# Altium PCB T6_1.PcbDoc
Units mm, origin at the board's own origin, x right, y up, seen from the top; angles counter-clockwise.
Board outline 152.4 x 101.6 mm, 2 copper layers (Top Layer, Bottom Layer); 100 components, 21 nets, 243 pads, 24 vias.
Unrouted connection lines stored in the file: 15.
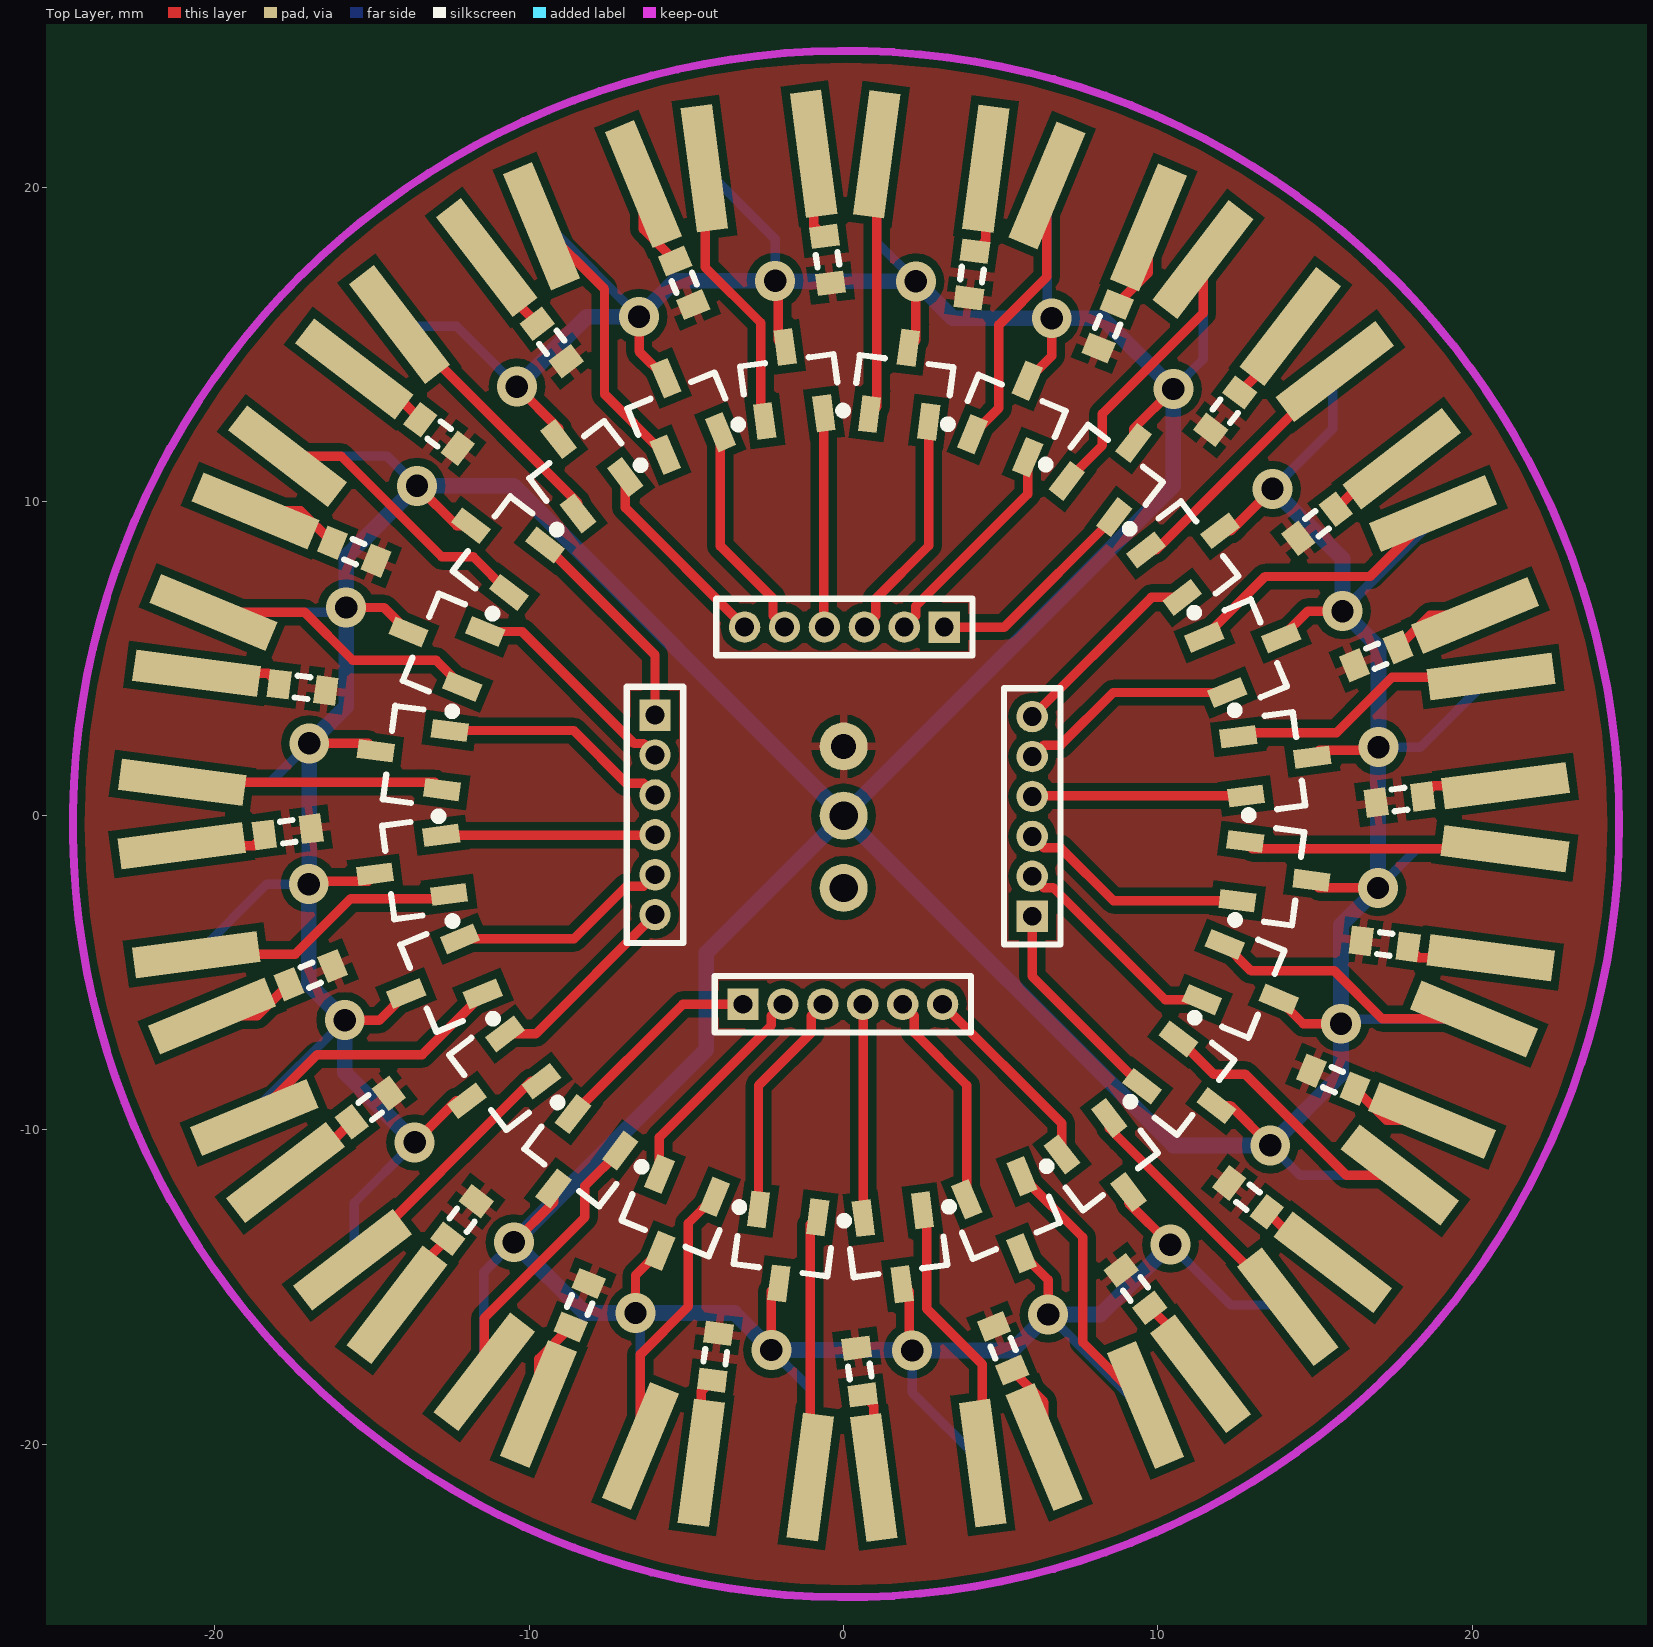
[diagram p0: Top Layer view]
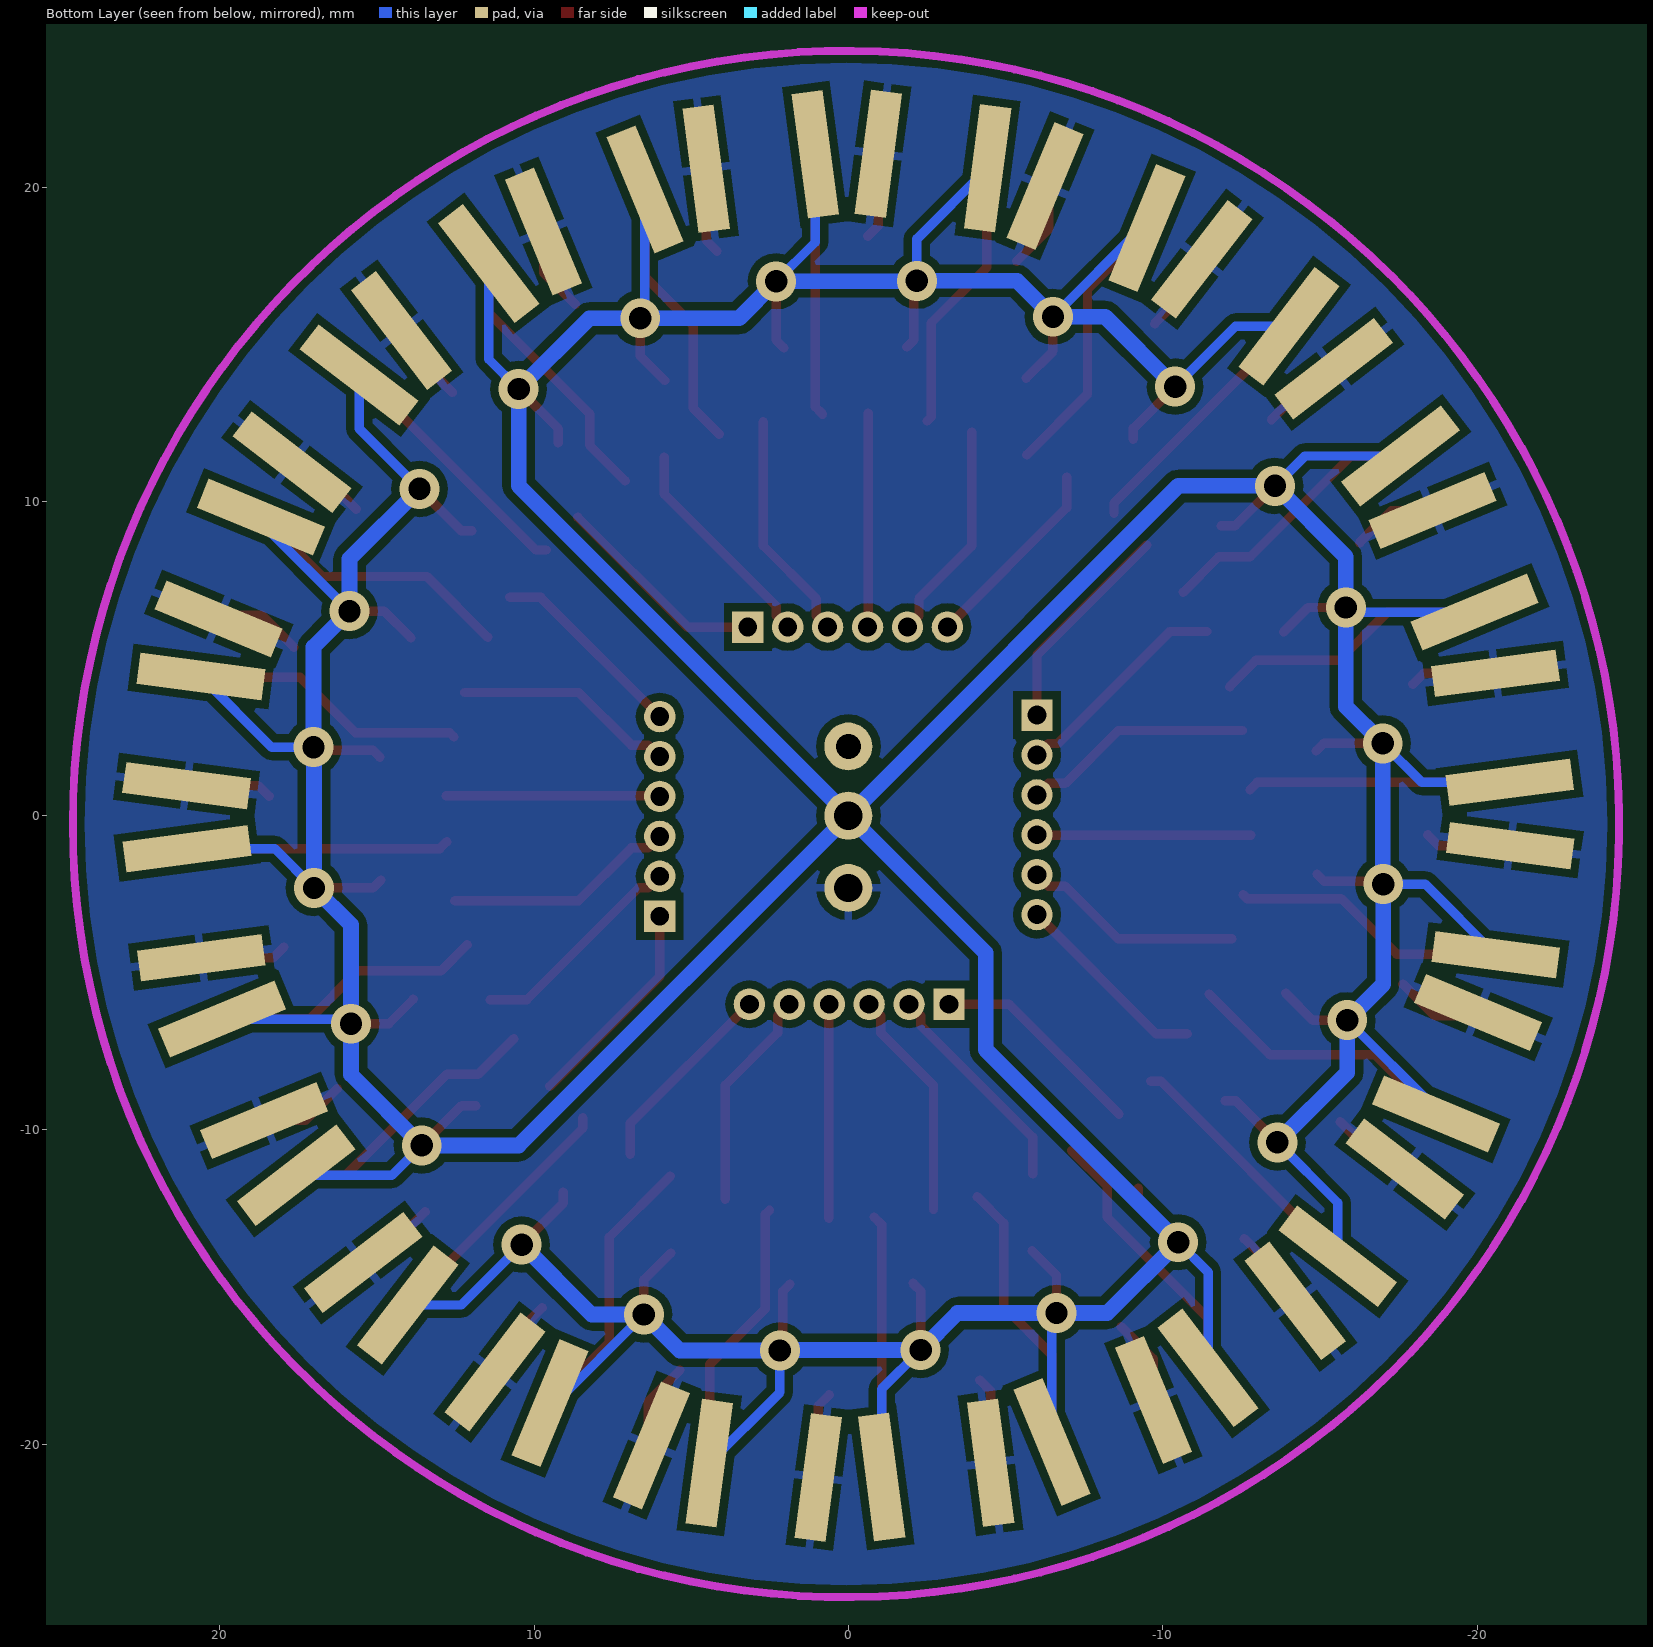
[diagram p1: Bottom Layer view, seen from below]

## Layer stack, top to bottom
Top Solder: solder mask 0.0102, Solder Resist, Dk 3.5
Top Layer: signal copper 0.0356
Dielectric 1: dielectric 0.32, FR-4, Dk 4.8
Bottom Layer: signal copper 0.0356
Bottom Solder: solder mask 0.0102, Solder Resist, Dk 3.5

## Board outline
-74.6,-56.4 77.8,-56.4 77.8,45.2 -74.6,45.2

## Design rules (kind name [scope] priority, off if disabled: settings)
Clearance [All] p1: gap=0.254
PolygonConnect [All] p1: connectstyle=Relief reliefconductorwidth=0.254 reliefentries=4 polygonreliefangle="90 Angle" airgapwidth=0.254
RoomDefinition SheetT6 [InComponentClass('SheetT6')] p1: confinementstyle=ConfineOut formatcopy=TRUE lockcomponents=FALSE outline 70.434,-54.495 166.446,-54.495 166.446,-36.207 70.434,-36.207
RoutingVias [All] p1: holewidth=0.711 width=1.27 viastyle="Through Hole" minholewidth=0.711 minwidth=1.27 maxholewidth=0.711 maxwidth=1.27
SolderMaskExpansion [All] p1: expansion=0.102
Width [All] p1: maxlimit=0.5 minlimit=0.3 preferedwidth=0.5
30 further rules are at their usual default settings.

## Classes and differential pairs
component class SheetT6: D1 D2 D3 D4 D5 D6 D? P1 P? Q1 Q2 Q3 Q4 Q5 Q6 R1 R2 R3 R4 R5 R6

## Components (designator, comment, footprint, x,y, rotation, side; value= is the part's Value field where it differs from the comment)
D1 "IR57-21C" SFH325 11.356,-17.756 r37.5 top
D1 "IR57-21C" SFH325 -17.756,-11.356 r307.5 top
D1 "IR57-21C" SFH325 17.756,11.356 r127.5 top
D1 "IR57-21C" SFH325 -11.356,17.756 r217.5 top
D2 "IR57-21C" SFH325 6.373,-20.09 r22.5 top
D2 "IR57-21C" SFH325 -20.09,-6.373 r292.5 top
D2 "IR57-21C" SFH325 20.09,6.373 r112.5 top
D2 "IR57-21C" SFH325 -6.373,20.09 r202.5 top
D3 "IR57-21C" SFH325 0.956,-21.055 r7.5 top
D3 "IR57-21C" SFH325 -21.055,-0.956 r277.5 top
D3 "IR57-21C" SFH325 21.055,0.956 r97.5 top
D3 "IR57-21C" SFH325 -0.956,21.055 r187.5 top
D4 "IR57-21C" SFH325 -4.526,-20.585 r352.5 top
D4 "IR57-21C" SFH325 -20.585,4.526 r262.5 top
D4 "IR57-21C" SFH325 20.585,-4.526 r82.5 top
D4 "IR57-21C" SFH325 4.526,20.585 r172.5 top
D5 "IR57-21C" SFH325 -9.699,-18.713 r337.5 top
D5 "IR57-21C" SFH325 -18.713,9.699 r247.5 top
D5 "IR57-21C" SFH325 18.713,-9.699 r67.5 top
D5 "IR57-21C" SFH325 9.699,18.713 r157.5 top
D6 "IR57-21C" SFH325 -14.212,-15.565 r322.5 top
D6 "IR57-21C" SFH325 -15.565,14.212 r232.5 top
D6 "IR57-21C" SFH325 15.565,-14.212 r52.5 top
D6 "IR57-21C" SFH325 14.212,15.565 r142.5 top
D? "PT57-21B" SFH325 -9.706,-18.585 r337.5 bottom
D? "PT57-21B" SFH325 -14.219,-15.437 r322.5 bottom
D? "PT57-21B" SFH325 -4.526,-20.585 r352.5 bottom
D? "PT57-21B" SFH325 0.956,-21.055 r7.5 bottom
D? "PT57-21B" SFH325 6.26,-20.033 r22.5 bottom
D? "PT57-21B" SFH325 11.242,-17.699 r37.5 bottom
D? "PT57-21B" SFH325 -17.699,-11.242 r307.5 bottom
D? "PT57-21B" SFH325 -20.033,-6.26 r292.5 bottom
D? "PT57-21B" SFH325 -21.055,-0.956 r277.5 bottom
D? "PT57-21B" SFH325 -20.585,4.526 r262.5 bottom
D? "PT57-21B" SFH325 -15.437,14.219 r232.5 bottom
D? "PT57-21B" SFH325 -18.585,9.706 r247.5 bottom
D? "PT57-21B" SFH325 18.585,-9.706 r67.5 bottom
D? "PT57-21B" SFH325 15.437,-14.219 r52.5 bottom
D? "PT57-21B" SFH325 20.585,-4.526 r82.5 bottom
D? "PT57-21B" SFH325 21.055,0.956 r97.5 bottom
D? "PT57-21B" SFH325 20.033,6.26 r112.5 bottom
D? "PT57-21B" SFH325 17.699,11.242 r127.5 bottom
D? "PT57-21B" SFH325 -11.242,17.699 r217.5 bottom
D? "PT57-21B" SFH325 -6.26,20.033 r202.5 bottom
D? "PT57-21B" SFH325 -0.956,21.055 r187.5 bottom
D? "PT57-21B" SFH325 4.526,20.585 r172.5 bottom
D? "PT57-21B" SFH325 14.219,15.437 r142.5 bottom
D? "PT57-21B" SFH325 9.706,18.585 r157.5 bottom
P? "MHDR1X6" MHDR1X6 -3.2,-6 r0 top
P? "MHDR1X6" MHDR1X6 -6,3.2 r270 top
P? "MHDR1X6" MHDR1X6 6,-3.2 r90 top
P? "MHDR1X6" MHDR1X6 3.2,6 r180 top
Q1 "AO3400" SOT-23B_N 8.382,-11.088 r307.5 top
Q1 "AO3400" SOT-23B_N -11.088,-8.382 r217.5 top
Q1 "AO3400" SOT-23B_N 11.088,8.382 r37.5 top
Q1 "AO3400" SOT-23B_N -8.382,11.088 r127.5 top
Q2 "AO3400" SOT-23B_N 5.227,-12.88 r292.5 top
Q2 "AO3400" SOT-23B_N -12.88,-5.227 r202.5 top
Q2 "AO3400" SOT-23B_N 12.88,5.227 r22.5 top
Q2 "AO3400" SOT-23B_N -5.227,12.88 r112.5 top
Q3 "AO3400" SOT-23B_N 1.715,-13.794 r277.5 top
Q3 "AO3400" SOT-23B_N -13.794,-1.715 r187.5 top
Q3 "AO3400" SOT-23B_N 13.794,1.715 r7.5 top
Q3 "AO3400" SOT-23B_N -1.715,13.794 r97.5 top
Q4 "AO3400" SOT-23B_N -1.913,-13.768 r262.5 top
Q4 "AO3400" SOT-23B_N -13.768,1.913 r172.5 top
Q4 "AO3400" SOT-23B_N 13.768,-1.913 r352.5 top
Q4 "AO3400" SOT-23B_N 1.913,13.768 r82.5 top
Q5 "AO3400" SOT-23B_N -5.412,-12.804 r247.5 top
Q5 "AO3400" SOT-23B_N -12.804,5.412 r157.5 top
Q5 "AO3400" SOT-23B_N 12.804,-5.412 r337.5 top
Q5 "AO3400" SOT-23B_N 5.412,12.804 r67.5 top
Q6 "AO3400" SOT-23B_N -8.541,-10.967 r232.5 top
Q6 "AO3400" SOT-23B_N -10.967,8.541 r142.5 top
Q6 "AO3400" SOT-23B_N 10.967,-8.541 r322.5 top
Q6 "AO3400" SOT-23B_N 8.541,10.967 r52.5 top
R1 "51R" J1-0603 9.286,-15.059 r127.5 top
R1 "51R" J1-0603 -15.059,-9.286 r37.5 top
R1 "51R" J1-0603 15.059,9.286 r217.5 top
R1 "51R" J1-0603 -9.286,15.059 r307.5 top
R2 "51R" J1-0603 5.072,-16.949 r112.5 top
R2 "51R" J1-0603 -16.949,-5.072 r22.5 top
R2 "51R" J1-0603 16.949,5.072 r202.5 top
R2 "51R" J1-0603 -5.072,16.949 r292.5 top
R3 "51R" J1-0603 0.513,-17.684 r97.5 top
R3 "51R" J1-0603 -17.684,-0.513 r7.5 top
R3 "51R" J1-0603 17.684,0.513 r187.5 top
R3 "51R" J1-0603 -0.513,17.684 r277.5 top
R4 "51R" J1-0603 -4.082,-17.214 r82.5 top
R4 "51R" J1-0603 -17.214,4.082 r352.5 top
R4 "51R" J1-0603 17.214,-4.082 r172.5 top
R4 "51R" J1-0603 4.082,17.214 r262.5 top
R5 "51R" J1-0603 -8.398,-15.571 r67.5 top
R5 "51R" J1-0603 -15.571,8.398 r337.5 top
R5 "51R" J1-0603 15.571,-8.398 r157.5 top
R5 "51R" J1-0603 8.398,15.571 r247.5 top
R6 "51R" J1-0603 -12.142,-12.867 r52.5 top
R6 "51R" J1-0603 -12.867,12.142 r322.5 top
R6 "51R" J1-0603 12.867,-12.142 r142.5 top
R6 "51R" J1-0603 12.142,12.867 r232.5 top

## Footprints (in the part's own frame and the unit in brackets; to place one, negate y for a bottom-side part, rotate by r counter-clockwise, add the part's x,y. Pads: shape width x height; smd on the part's side, far side on the other; paste and mask are expansions set on the pad)
J1-0603 [mm] "Chip Resistor, Body 1.6x0.8mm, IPC High Density"
  rect 0.7x0.9 smd: 1(-0.75,0) 2(0.75,0)
  silkscreen extent -0.2,-0.35 0.2,0.35, body extent -0.85,-0.48 0.85,0.48, height 0.9
MHDR1X6 [mm] "Connector; Header; 6 Position"
  rect 1x1 hole 0.6: 1(0,0)
  round 1 hole 0.6: 2(1.27,0) 3(2.54,0) 4(3.81,0) 5(5.08,0) 6(6.35,0)
  silkscreen extent -0.9,-0.9 7.25,0.9
SFH325 [mm]
  rect 1x4 smd: 1(0,0) 2(3.5,0)
SOT-23B_N [mm] "SOT23, 3-Leads, Body 2.9x1.3mm, Pitch 0.95mm, Lead Span 2.4mm, IPC Medium Density"
  rect 1.15x0.6 smd: 1(-1.125,0.95) 2(-1.125,-0.95) 3(1.125,0)
  silkscreen extent -1.25,-1.5 0.7,1.92, body extent -0.7,-1.5 0.7,1.5, height 1.14

## Part data
D1 D1 D1 D1 D2 D2 D2 D2 D3 D3 D3 D3 D4 D4 D4 D4 D5 D5 D5 D5 D6 D6 D6 D6 D? D? D? D? D? D? D? D? D? D? D? D? D? D? D? D? D? D? D? D? D? D? D? D?: library part Diode, "Default Diode"
P? P? P? P?: "Header, 6-Pin"
Q1 Q1 Q1 Q1 Q2 Q2 Q2 Q2 Q3 Q3 Q3 Q3 Q4 Q4 Q4 Q4 Q5 Q5 Q5 Q5 Q6 Q6 Q6 Q6: library part MOSFET-N, "N-Channel MOSFET"
R1 R1 R1 R1 R2 R2 R2 R2 R3 R3 R3 R3 R4 R4 R4 R4 R5 R5 R5 R5 R6 R6 R6 R6: library part Res3, "Resistor"

## Free pads (board coordinates)
  round 1.524 hole 0.9: 5(0,0) 6(0,-2.3)
  round 1.524 hole 0.8: 7(0,2.2)

## Via types
v1: diameter 1.27, hole 0.711, Top Layer to Bottom Layer, 24 vias

## Nets (pads, with @x,y where several pads share a name; then routed paths per layer and width w, separated by ;. In a path a pad name is that pad's centre, name@x,y a point inside that pad or via, vN(x,y) a via of type N, cw(c..) or ccw(c..) an arc to the next point about the centre after c; other vN are vias at no path point)
GND: D?.2@4.427,-20.598 D?.2@9.493,-18.693 D?.2@14.019,-15.568 D?.2@-1.056,-21.042 D?.2@-6.473,-19.925 D?.2@-11.442,-17.568 pad.5 Q1.3@9.067,-11.981 Q2.3@5.657,-13.92 Q3.3@1.862,-14.91 Q4.3@-2.06,-14.883 Q5.3@-5.842,-13.843 Q6.3@-9.226,-11.859 | length 135.1
  Top Layer w0.3: v1(-10.492,-13.572) -9.226,-12.307 Q6.3@-9.226,-11.859 ; v1(-6.622,-15.825) -6.622,-14.622 Q5.3@-5.842,-13.843 ; v1(-2.3,-17) -2.3,-15.123 Q4.3@-2.06,-14.883 ; Q3.3@1.862,-14.91 2.084,-15.132 2.084,-16.922 v1(2.178,-17.016) ; Q2.3@5.657,-13.92 6.508,-14.77 v1(6.508,-15.872) ; Q1.3@9.067,-11.981 9.067,-12.32 v1(10.394,-13.647)
  Bottom Layer w0.3: D?.2@-11.442,-17.568 -11.442,-14.523 v1(-10.492,-13.572) ; v1(-6.622,-15.825) -6.473,-15.974 D?.2@-6.473,-19.925 ; v1(-2.3,-17) -1.056,-18.244 D?.2@-1.056,-21.042 ; v1(2.178,-17.016) 2.178,-18.35 D?.2@4.427,-20.598 ; v1(6.508,-15.872) 9.329,-18.693 D?.2@9.493,-18.693 ; v1(10.394,-13.647) 12.315,-15.568 D?.2@14.019,-15.568
  Bottom Layer w0.5: v1(-13.572,10.492) -10.492,10.492 pad.5 ; v1(10.394,-13.647) 8.169,-15.872 v1(6.508,-15.872) 5.365,-17.016 v1(2.178,-17.016) 2.162,-17 v1(-2.3,-17) -3.475,-15.825 v1(-6.622,-15.825) -8.239,-15.825 v1(-10.492,-13.572) -4.369,-7.45 -4.369,-4.369 pad.5 ; v1(10.492,13.572) 10.492,10.492 pad.5 ; v1(13.572,-10.492) 10.492,-10.492 pad.5
  other v1: -13.647,-10.394 15.825,-6.622 -15.872,-6.508 17,-2.3 -17.016,-2.178 17.016,2.178 -17,2.3 15.872,6.508 -15.825,6.622 13.647,10.394 -10.394,13.647 6.622,15.825 -6.508,15.872 -2.178,17.016 2.3,17
NetD1_1: D1.1@11.356,-17.756 R1.1@9.743,-15.654 | length 2.8
  Top Layer w0.3: R1.1@9.743,-15.654 11.356,-17.267 D1.1@11.356,-17.756
NetD1_2: D1.2@14.133,-15.626 Q1.1@8.451,-9.618 | length 8.4
  Top Layer w0.3: Q1.1@8.451,-9.618 8.451,-9.944 D1.2@14.133,-15.626
NetD2_1: D2.1@6.373,-20.09 R2.1@5.359,-17.642 | length 2.9
  Top Layer w0.3: R2.1@5.359,-17.642 6.373,-18.656 D2.1@6.373,-20.09
NetD2_2: D2.2@9.607,-18.751 Q2.1@5.674,-11.477 | length 8.9
  Top Layer w0.3: Q2.1@5.674,-11.477 7.608,-13.411 7.608,-16.752 D2.2@9.607,-18.751
NetD3_1: D3.1@0.956,-21.055 R3.1@0.611,-18.428 | length 2.8
  Top Layer w0.3: R3.1@0.611,-18.428 0.956,-18.774 D3.1@0.956,-21.055
NetD3_2: D3.2@4.427,-20.598 Q3.1@2.51,-12.555 | length 8.8
  Top Layer w0.3: Q3.1@2.51,-12.555 2.638,-12.683 2.638,-15.68 4.406,-17.448 4.406,-20.598 D3.2@4.427,-20.598
NetD4_1: D4.1@-4.526,-20.585 R4.1@-4.18,-17.958 | length 2.8
  Top Layer w0.3: D4.1@-4.526,-20.585 -4.526,-18.304 R4.1@-4.18,-17.958
NetD4_2: D4.2@-1.056,-21.042 Q4.1@-0.825,-12.777 | length 8.4
  Top Layer w0.3: D4.2@-1.056,-21.042 -1.056,-13.008 Q4.1@-0.825,-12.777
NetD5_1: D5.1@-9.699,-18.713 R5.1@-8.685,-16.264 | length 2.9
  Top Layer w0.3: D5.1@-9.699,-18.713 -9.699,-17.278 R5.1@-8.685,-16.264
NetD5_2: D5.2@-6.466,-20.052 Q5.1@-4.103,-12.128 | length 8.9
  Top Layer w0.3: D5.2@-6.466,-20.052 -6.466,-17.139 -4.941,-15.614 -4.941,-12.965 Q5.1@-4.103,-12.128
NetD6_1: D6.1@-14.212,-15.565 R6.1@-12.599,-13.462 | length 2.8
  Top Layer w0.3: D6.1@-14.212,-15.565 -14.212,-15.075 R6.1@-12.599,-13.462
NetD6_2: D6.2@-11.435,-17.695 Q6.1@-7.103,-10.653 | length 8.8
  Top Layer w0.3: D6.2@-11.435,-17.695 -11.435,-15.985 -8.234,-12.784 -8.234,-11.784 Q6.1@-7.103,-10.653
NetP?_1: P?.1@-3.2,-6 Q6.2@-8.61,-9.496 | length 6.9
  Top Layer w0.3: Q6.2@-8.61,-9.496 -5.114,-6 P?.1@-3.2,-6
NetP?_2: P?.2@-1.93,-6 Q5.2@-5.859,-11.401 | length 7
  Top Layer w0.3: Q5.2@-5.859,-11.401 -5.859,-10.23 -2.296,-6.667 -2.296,-6.366 P?.2@-1.93,-6
NetP?_3: P?.3@-0.66,-6 Q4.2@-2.708,-12.529 | length 7.4
  Top Layer w0.3: Q4.2@-2.708,-12.529 -2.708,-8.586 -1.026,-6.904 -1.026,-6.366 P?.3@-0.66,-6
NetP?_4: P?.4@0.61,-6 Q3.2@0.626,-12.803 | length 6.8
  Top Layer w0.3: P?.4@0.61,-6 0.626,-6.016 Q3.2@0.626,-12.803
NetP?_5: P?.5@1.88,-6 Q2.2@3.919,-12.204 | length 7
  Top Layer w0.3: P?.5@1.88,-6 2.246,-6.366 2.246,-6.904 3.919,-8.577 Q2.2@3.919,-12.204
NetP?_6: P?.6@3.15,-6 Q1.2@6.944,-10.774 | length 6.3
  Top Layer w0.3: P?.6@3.15,-6 6.944,-9.794 Q1.2@6.944,-10.774
VCC: pad.7 R1.2 R2.2 R3.2 R4.2 R5.2 R6.2
VCC2: D?.1 pad.6
pads on no net: D1.1@17.756,11.356 D1.1@-11.356,17.756 D1.1@-17.756,-11.356 D1.2@15.626,14.133 D1.2@-14.133,15.626 D1.2@-15.626,-14.133 D2.1@20.09,6.373 D2.1@-6.373,20.09 D2.1@-20.09,-6.373 D2.2@18.751,9.607 D2.2@-9.607,18.751 D2.2@-18.751,-9.607 D3.1@21.055,0.956 D3.1@-0.956,21.055 D3.1@-21.055,-0.956 D3.2@20.598,4.427 D3.2@-4.427,20.598 D3.2@-20.598,-4.427 D4.1@4.526,20.585 D4.1@20.585,-4.526 D4.1@-20.585,4.526 D4.2@1.056,21.042 D4.2@21.042,-1.056 D4.2@-21.042,1.056 D5.1@9.699,18.713 D5.1@18.713,-9.699 D5.1@-18.713,9.699 D5.2@6.466,20.052 D5.2@20.052,-6.466 D5.2@-20.052,6.466 D6.1@14.212,15.565 D6.1@15.565,-14.212 D6.1@-15.565,14.212 D6.2@11.435,17.695 D6.2@17.695,-11.435 D6.2@-17.695,11.435 D?.2@1.056,21.042 D?.2@6.473,19.925 D?.2@11.442,17.568 D?.2@15.568,14.019 D?.2@17.568,-11.442 D?.2@18.693,9.493 D?.2@19.925,-6.473 D?.2@20.598,4.427 D?.2@21.042,-1.056 D?.2@-4.427,20.598 D?.2@-9.493,18.693 D?.2@-14.019,15.568 D?.2@-15.568,-14.019 D?.2@-17.568,11.442 D?.2@-18.693,-9.493 D?.2@-19.925,6.473 D?.2@-20.598,-4.427 D?.2@-21.042,1.056 P?.1@3.2,6 P?.1@6,-3.2 P?.1@-6,3.2 P?.2@1.93,6 P?.2@6,-1.93 P?.2@-6,1.93 P?.3@0.66,6 P?.3@6,-0.66 P?.3@-6,0.66 P?.4@6,0.61 P?.4@-0.61,6 P?.4@-6,-0.61 P?.5@6,1.88 P?.5@-1.88,6 P?.5@-6,-1.88 P?.6@6,3.15 P?.6@-3.15,6 P?.6@-6,-3.15 Q1.1@9.618,8.451 Q1.1@-8.451,9.618 Q1.1@-9.618,-8.451 Q1.2@10.774,6.944 Q1.2@-6.944,10.774 Q1.2@-10.774,-6.944 Q1.3@11.981,9.067 Q1.3@-9.067,11.981 Q1.3@-11.981,-9.067 Q2.1@11.477,5.674 Q2.1@-5.674,11.477 Q2.1@-11.477,-5.674 Q2.2@12.204,3.919 Q2.2@-3.919,12.204 Q2.2@-12.204,-3.919 Q2.3@13.92,5.657 Q2.3@-5.657,13.92 Q2.3@-13.92,-5.657 Q3.1@12.555,2.51 Q3.1@-2.51,12.555 Q3.1@-12.555,-2.51 Q3.2@12.803,0.626 Q3.2@-0.626,12.803 Q3.2@-12.803,-0.626 Q3.3@14.91,1.862 Q3.3@-1.862,14.91 Q3.3@-14.91,-1.862 Q4.1@0.825,12.777 Q4.1@12.777,-0.825 Q4.1@-12.777,0.825 Q4.2@2.708,12.529 Q4.2@12.529,-2.708 Q4.2@-12.529,2.708 Q4.3@2.06,14.883 Q4.3@14.883,-2.06 Q4.3@-14.883,2.06 Q5.1@4.103,12.128 Q5.1@12.128,-4.103 Q5.1@-12.128,4.103 Q5.2@5.859,11.401 Q5.2@11.401,-5.859 Q5.2@-11.401,5.859 Q5.3@5.842,13.843 Q5.3@13.843,-5.842 Q5.3@-13.843,5.842 Q6.1@7.103,10.653 Q6.1@10.653,-7.103 Q6.1@-10.653,7.103 Q6.2@8.61,9.496 Q6.2@9.496,-8.61 Q6.2@-9.496,8.61 Q6.3@9.226,11.859 Q6.3@11.859,-9.226 Q6.3@-11.859,9.226 R1.1@15.654,9.743 R1.1@-9.743,15.654 R1.1@-15.654,-9.743 R2.1@17.642,5.359 R2.1@-5.359,17.642 R2.1@-17.642,-5.359 R3.1@18.428,0.611 R3.1@-0.611,18.428 R3.1@-18.428,-0.611 R4.1@4.18,17.958 R4.1@17.958,-4.18 R4.1@-17.958,4.18 R5.1@8.685,16.264 R5.1@16.264,-8.685 R5.1@-16.264,8.685 R6.1@12.599,13.462 R6.1@13.462,-12.599 R6.1@-13.462,12.599
copper on no net: | length 521.8
  Top Layer w0.3: -21.055,-0.956 -18.774,-0.956 -18.428,-0.611 ; -21.042,1.056 -13.008,1.056 -12.777,0.825 ; -20.598,-4.427 -20.598,-4.406 -17.448,-4.406 -15.68,-2.638 -12.683,-2.638 -12.555,-2.51 ; -20.585,4.526 -18.304,4.526 -17.958,4.18 ; -20.09,-6.373 -18.656,-6.373 -17.642,-5.359 ; -20.052,6.466 -17.139,6.466 -15.614,4.941 -12.965,4.941 -12.128,4.103 ; -18.751,-9.607 -16.752,-7.608 -13.411,-7.608 -11.477,-5.674 ; -18.713,9.699 -17.278,9.699 -16.264,8.685 ; -17.756,-11.356 -17.267,-11.356 -15.654,-9.743 ; -17.695,11.435 -15.985,11.435 -12.784,8.234 -11.784,8.234 -10.653,7.103 ; -17.016,-2.178 -16.922,-2.084 -15.132,-2.084 -14.91,-1.862 ; -17,2.3 -15.123,2.3 -14.883,2.06 ; -15.872,-6.508 -14.77,-6.508 -13.92,-5.657 ; -15.825,6.622 -14.622,6.622 -13.843,5.842 ; -15.626,-14.133 -9.944,-8.451 -9.618,-8.451 ; -15.565,14.212 -15.075,14.212 -13.462,12.599 ; -14.133,15.626 -8.451,9.944 -8.451,9.618 ; -13.647,-10.394 -12.32,-9.067 -11.981,-9.067 ; -13.572,10.492 -12.307,9.226 -11.859,9.226 ; -12.803,-0.626 -6.016,-0.626 -6,-0.61 ; -12.529,2.708 -8.586,2.708 -6.904,1.026 -6.366,1.026 -6,0.66 ; -12.204,-3.919 -8.577,-3.919 -6.904,-2.246 -6.366,-2.246 -6,-1.88 ; -11.401,5.859 -10.23,5.859 -6.667,2.296 -6.366,2.296 -6,1.93 ; -11.356,17.756 -11.356,17.267 -9.743,15.654 ; -10.774,-6.944 -9.794,-6.944 -6,-3.15 ; -10.394,13.647 -9.067,12.32 -9.067,11.981 ; -9.607,18.751 -7.608,16.752 -7.608,13.411 -5.674,11.477 ; -9.496,8.61 -6,5.114 -6,3.2 ; -6.944,10.774 -6.944,9.794 -3.15,6 ; -6.508,15.872 -6.508,14.77 -5.657,13.92 ; -6.373,20.09 -6.373,18.656 -5.359,17.642 ; -4.427,20.598 -4.406,20.598 -4.406,17.448 -2.638,15.68 -2.638,12.683 -2.51,12.555 ; -3.919,12.204 -3.919,8.577 -2.246,6.904 -2.246,6.366 -1.88,6 ; -2.178,17.016 -2.084,16.922 -2.084,15.132 -1.862,14.91 ; -0.956,21.055 -0.956,18.774 -0.611,18.428 ; -0.626,12.803 -0.626,6.016 -0.61,6 ; 0.66,6 1.026,6.366 1.026,6.904 2.708,8.586 2.708,12.529 ; 0.825,12.777 1.056,13.008 1.056,21.042 ; 1.93,6 2.296,6.366 2.296,6.667 5.859,10.23 5.859,11.401 ; 2.06,14.883 2.3,15.123 2.3,17 ; 3.2,6 5.114,6 8.61,9.496 ; 4.103,12.128 4.941,12.965 4.941,15.614 6.466,17.139 6.466,20.052 ; 4.18,17.958 4.526,18.304 4.526,20.585 ; 5.842,13.843 6.622,14.622 6.622,15.825 ; 6,-3.2 6,-5.114 9.496,-8.61 ; 6,-1.93 6.366,-2.296 6.667,-2.296 10.23,-5.859 11.401,-5.859 ; 6,-0.66 6.366,-1.026 6.904,-1.026 8.586,-2.708 12.529,-2.708 ; 6,0.61 6.016,0.626 12.803,0.626 ; 6,1.88 6.366,2.246 6.904,2.246 8.577,3.919 12.204,3.919 ; 6,3.15 9.794,6.944 10.774,6.944 ; 7.103,10.653 8.234,11.784 8.234,12.784 11.435,15.985 11.435,17.695 ; 8.685,16.264 9.699,17.278 9.699,18.713 ; 9.226,11.859 9.226,12.307 10.492,13.572 ; 9.618,8.451 9.944,8.451 15.626,14.133 ; 10.653,-7.103 11.784,-8.234 12.784,-8.234 15.985,-11.435 17.695,-11.435 ; 11.477,5.674 13.411,7.608 16.752,7.608 18.751,9.607 ; 11.859,-9.226 12.307,-9.226 13.572,-10.492 ; 11.981,9.067 12.32,9.067 13.647,10.394 ; 12.128,-4.103 12.965,-4.941 15.614,-4.941 17.139,-6.466 20.052,-6.466 ; 12.555,2.51 12.683,2.638 15.68,2.638 17.448,4.406 20.598,4.406 20.598,4.427 ; 12.599,13.462 14.212,15.075 14.212,15.565 ; 12.777,-0.825 13.008,-1.056 21.042,-1.056 ; 13.462,-12.599 15.075,-14.212 15.565,-14.212 ; 13.843,-5.842 14.622,-6.622 15.825,-6.622 ; 13.92,5.657 14.77,6.508 15.872,6.508 ; 14.883,-2.06 15.123,-2.3 17,-2.3 ; 14.91,1.862 15.132,2.084 16.922,2.084 17.016,2.178 ; 15.654,9.743 17.267,11.356 17.756,11.356 ; 16.264,-8.685 17.278,-9.699 18.713,-9.699 ; 17.642,5.359 18.656,6.373 20.09,6.373 ; 17.958,-4.18 18.304,-4.526 20.585,-4.526 ; 18.428,0.611 18.774,0.956 21.055,0.956
  Bottom Layer w0.3: -21.042,1.056 -18.244,1.056 -17,2.3 ; -20.598,-4.427 -18.35,-2.178 -17.016,-2.178 ; -19.925,6.473 -15.974,6.473 -15.825,6.622 ; -18.693,-9.493 -18.693,-9.329 -15.872,-6.508 ; -17.568,11.442 -14.523,11.442 -13.572,10.492 ; -15.568,-14.019 -15.568,-12.315 -13.647,-10.394 ; -14.019,15.568 -12.315,15.568 -10.394,13.647 ; -9.493,18.693 -9.329,18.693 -6.508,15.872 ; -4.427,20.598 -2.178,18.35 -2.178,17.016 ; 1.056,21.042 1.056,18.244 2.3,17 ; 6.473,19.925 6.473,15.974 6.622,15.825 ; 10.492,13.572 11.442,14.523 11.442,17.568 ; 13.572,-10.492 14.523,-11.442 17.568,-11.442 ; 13.647,10.394 15.568,12.315 15.568,14.019 ; 15.825,-6.622 15.974,-6.473 19.925,-6.473 ; 15.872,6.508 18.693,9.329 18.693,9.493 ; 17,-2.3 18.244,-1.056 21.042,-1.056 ; 17.016,2.178 18.35,2.178 20.598,4.427
  Bottom Layer w0.5: -13.647,-10.394 -15.872,-8.169 -15.872,-6.508 -17.016,-5.365 -17.016,-2.178 -17,-2.162 -17,2.3 -15.825,3.475 -15.825,6.622 -15.825,8.239 -13.572,10.492 ; -10.394,13.647 -8.169,15.872 -6.508,15.872 -5.365,17.016 -2.178,17.016 -2.162,17 2.3,17 3.475,15.825 6.622,15.825 8.239,15.825 10.492,13.572 ; 13.572,-10.492 15.825,-8.239 15.825,-6.622 15.825,-3.475 17,-2.3 17,2.162 17.016,2.178 17.016,5.365 15.872,6.508 15.872,8.169 13.647,10.394

## Polygon pours and split planes (outlines as drawn)
VCC2 on Bottom Layer "Top Layer-No Net" (solid, remove dead copper, pour order 8): 26.619,25.642 24.841,27.42 -37.262,27.42 -37.262,-28.587 -36.627,-29.222 -36.246,-29.603 37.033,-29.603
VCC on Top Layer "Top Layer-No Net" (solid, remove dead copper, pour order 10): -33.452,31.992 28.016,31.992 32.715,27.293 34.747,25.261 34.747,-33.286 -28.88,-33.286 -34.468,-27.698

## Keep-outs
Keep-Out Layer:
  circle w0.254: c0.076,-0.266 r24.6